# Altium PCB PCB_PFC_V01.PcbDoc
Units mil, origin at the board's own origin, x right, y up, seen from the top; angles counter-clockwise.
Board outline 3925 x 2500 mil, 2 copper layers (Top Layer, Bottom Layer); 43 components, 23 nets, 95 pads, 0 vias.
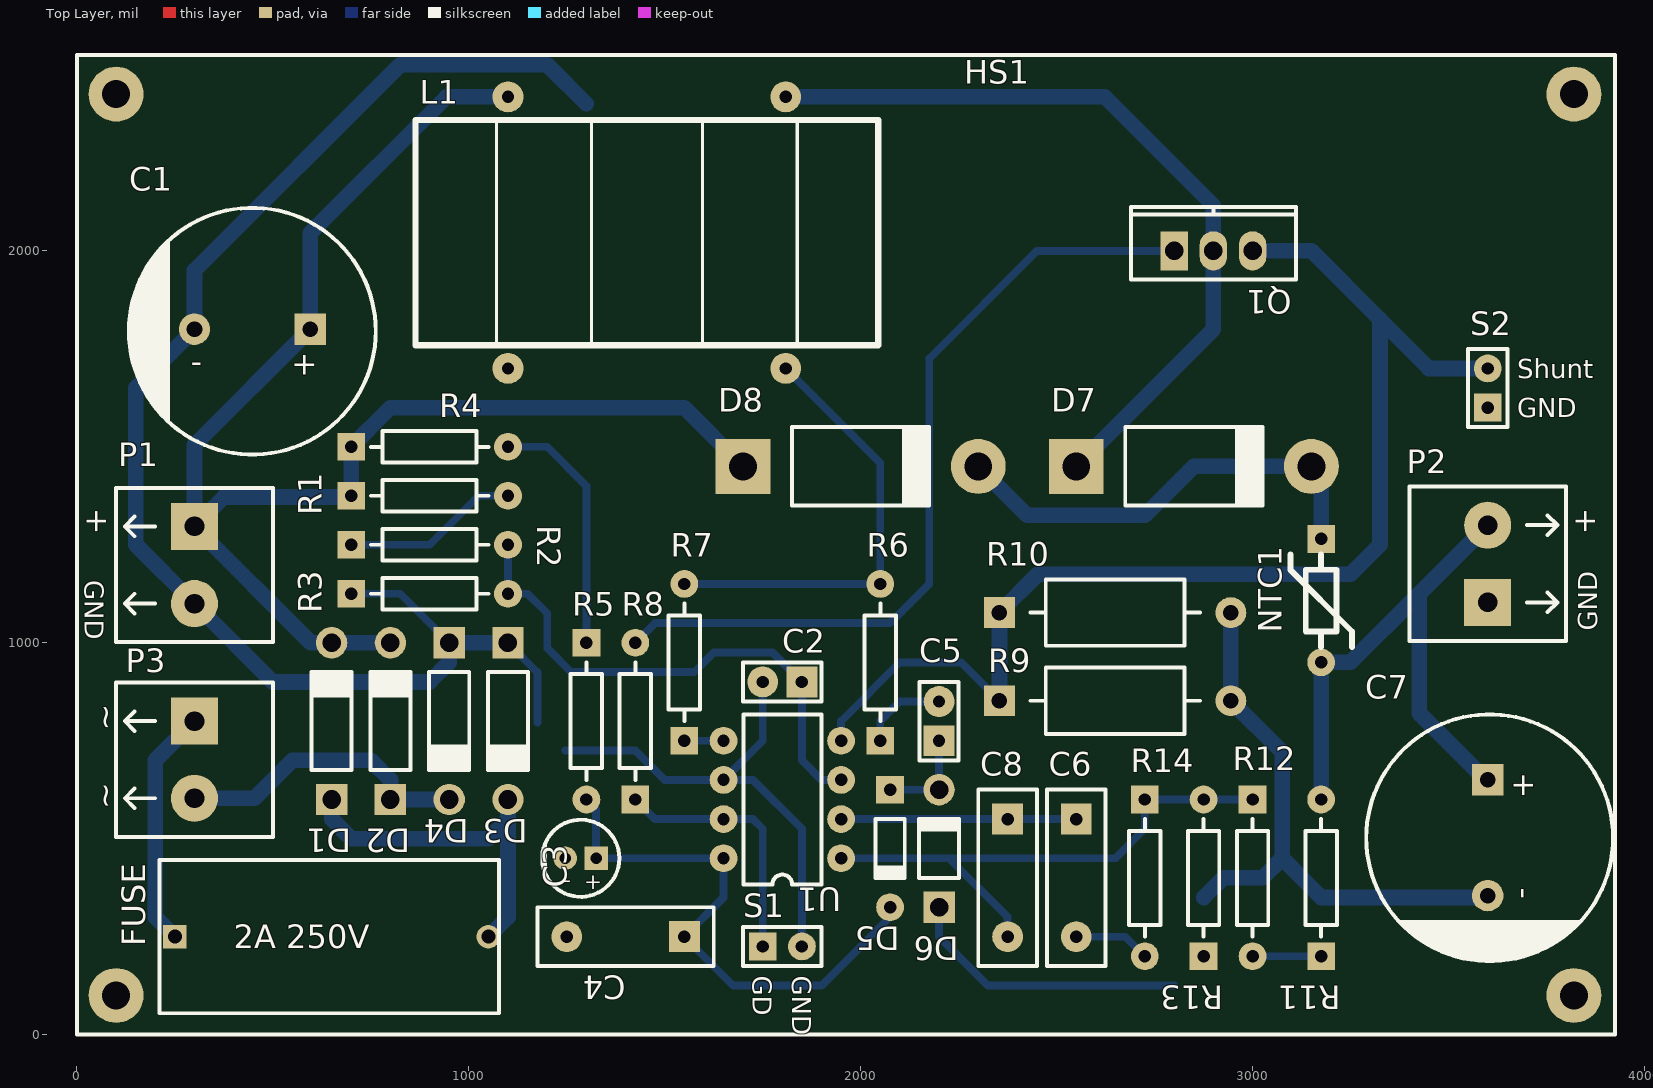
[diagram p0: Top Layer view]
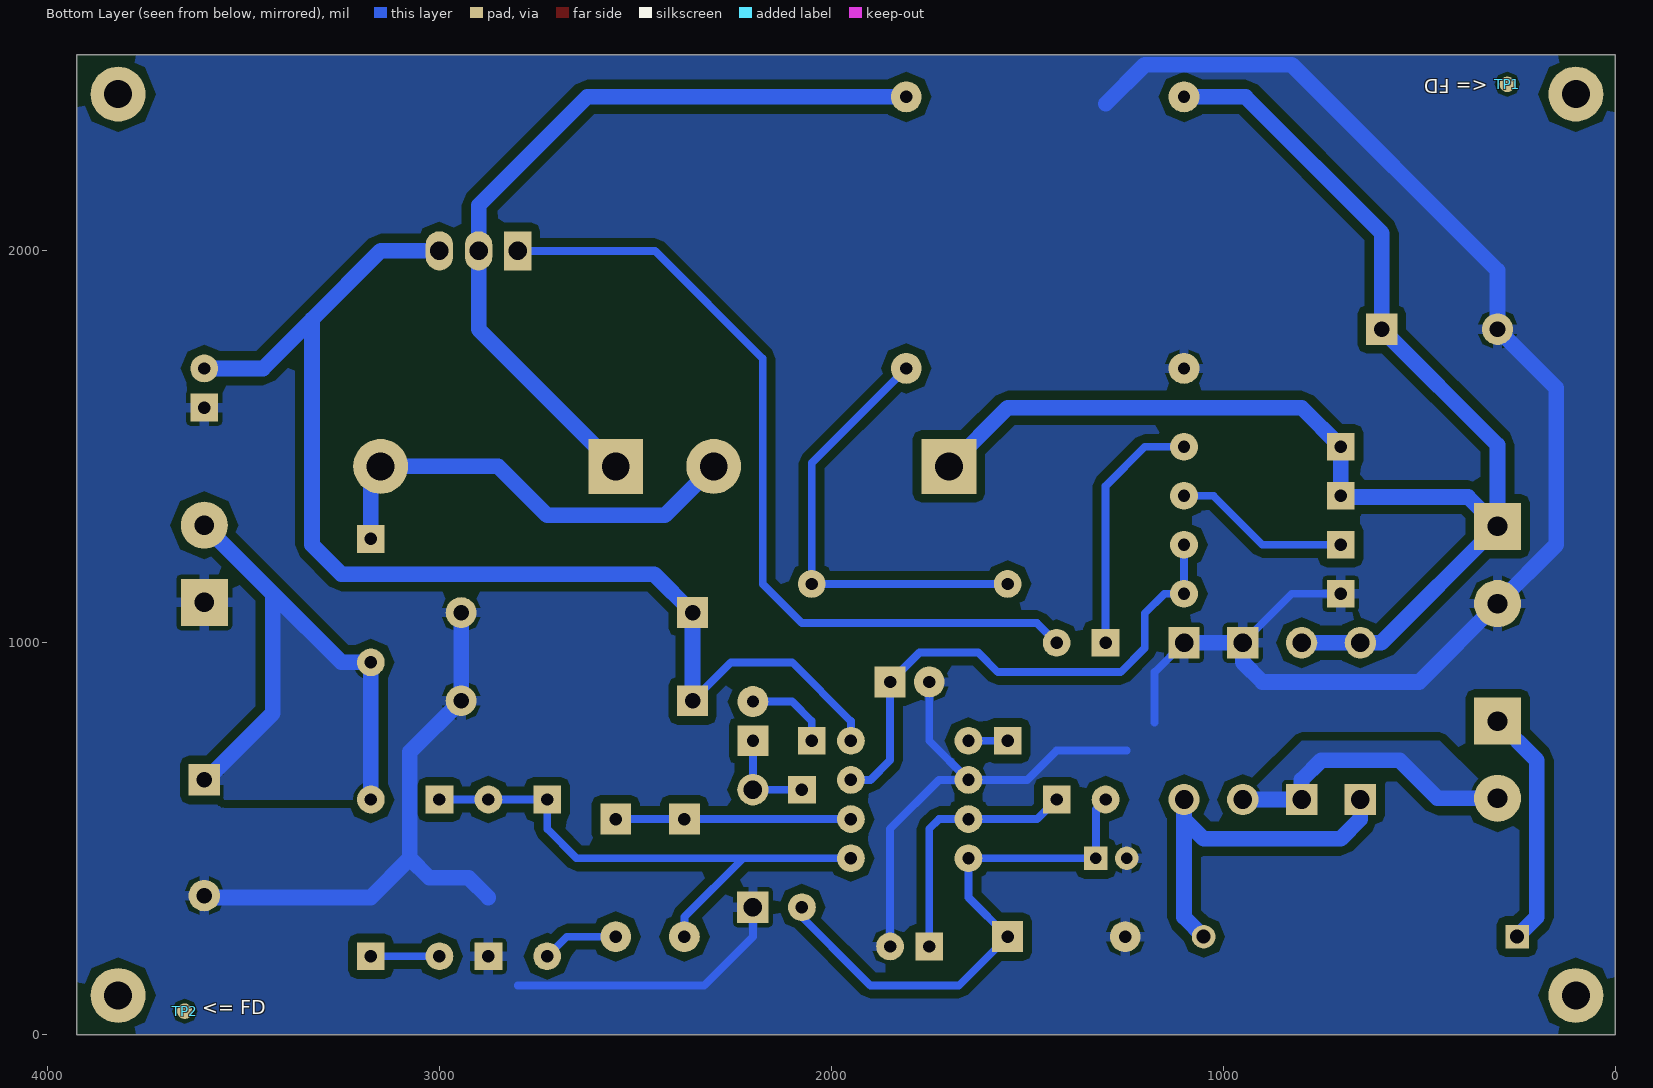
[diagram p1: Bottom Layer view, seen from below]
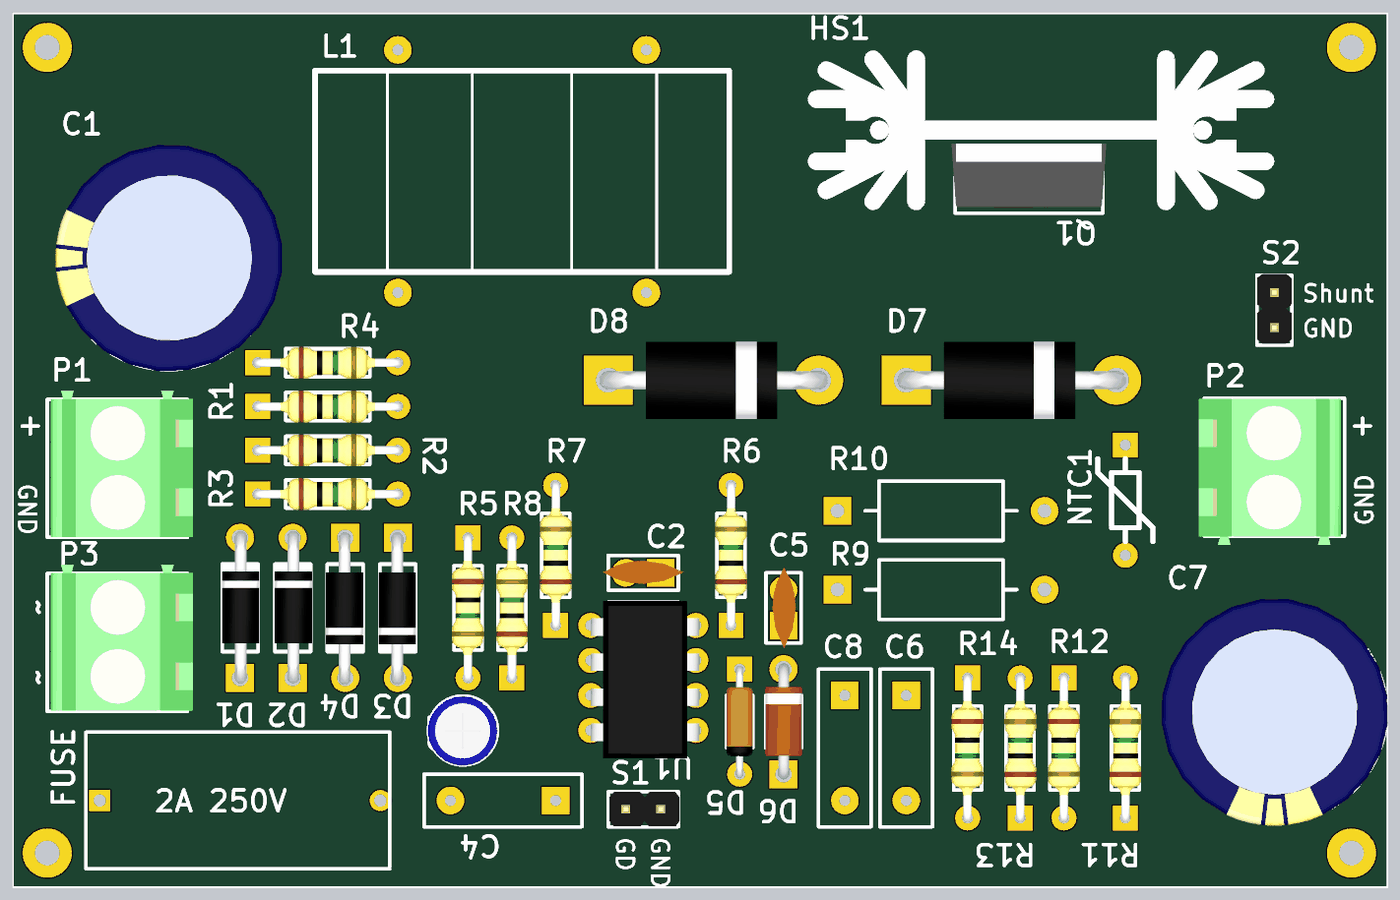
[diagram p2: 3D render of the assembled board from above, using the file's embedded part models]

## Layer stack, top to bottom
Top Solder: solder mask 0.4, Solder Resist, Dk 3.5
Top Layer: signal copper 1.4
Dielectric 1: dielectric 12.6, FR-4, Dk 4.8
Bottom Layer: signal copper 1.4
Bottom Solder: solder mask 0.4, Solder Resist, Dk 3.5

## Board outline
0,0 0,2500 3925,2500 3925,0

## Design rules (kind name [scope] priority, off if disabled: settings)
Clearance [All] p1: gap=10 ignorepadtopadclearanceinfootprint=FALSE except(0: Arc-Hole Track-Hole SMDPad-Hole THPad-Hole Via-Hole Fill-Hole Poly-Hole Region-Hole Text-Hole; 20: Arc-Arc Arc-Track Arc-THPad Arc-Fill Arc-Poly Arc-Region Track-Track Track-THPad Track-Fill Track-Poly Track-Region THPad-Fill THPad-Poly THPad-Region Fill-Fill Fill-Poly Fill-Region Poly-Poly Poly-Region Region-Region)
Height [All] p1: minheight=0 maxheight=3000 prefheight=500
PlaneConnect [All] p1: planeconnectstyle=Relief reliefexpansion=20 reliefentries=4 reliefconductorwidth=30 reliefairgap=10
PolygonConnect [All] p1: connectstyle=Relief reliefconductorwidth=25 reliefentries=4 polygonreliefangle="90 Angle" airgapwidth=10
RoutingVias [All] p1: holewidth=28 width=50 viastyle="Through Hole" minholewidth=28 minwidth=50 maxholewidth=28 maxwidth=50
SolderMaskExpansion [All] p1: expansion=4
Width [All] p1: maxlimit=40 minlimit=10 preferedwidth=20
28 further rules are at their usual default settings.

## Components (designator, comment, footprint, x,y, rotation, side; value= is the part's Value field where it differs from the comment)
C1 "1u" CP-16.0mm-25.0mm-7.5mm 595.28,1800 r0 top
C2 "Value" C100-200-100 1850,900 r180 top
C3 "22u" CP-5.0mm-11.0mm-2.0mm 1325,450 r0 top
C4 "100n" C300-450-150 1550,250 r180 top
C5 "12nF" C100-200-100 2200,750 r90 top
C6 "2.2u" C300-450-150 2550,550 r270 top
C7 "Value" CP-16.0mm-25.0mm-7.5mm 3600,650 r90 top
C8 "680n" C300-450-150 2375,550 r270 top
D1 "1N4007" DO-41-Plastic 650,600 r90 top
D2 "1N4007" DO-41-Plastic 800,600 r90 top
D3 "1N4007" DO-41-Plastic 1100,1000 r270 top
D4 "1N4007" DO-41-Plastic 950,1000 r270 top
D5 "1N4150" DO-35-Glass 2075,625 r270 top
D6 "1N4746A" DO-41-Glass 2200,325 r90 top
D7 "1N5401" DO-201-Plastic 2550,1450 r0 top
D8 "1N5401" DO-201-Plastic 1700,1450 r0 top
FUSE "Value" Fuse 250,250 r0 top
HS1 "HS-TO-220" HS-TO-220-183012 3600,2392 r180 top
L1 "Indutor" "NEE 30/15/14" 1454.33,2333.86 r180 top
NTC1 "Value" Thermistor-315mil 3175,1264.96 r270 top
P1 "DC_input" KRE_2 300,1296.85 r270 top
P2 "Terminal" KRE_2 3600,1103.15 r90 top
P3 "AC_input" KRE_2 300,800 r270 top
Q1 "IRF840" TO-220/123 2800,2000 r0 top
R1 "1.5M" R400-2.0mm 700,1375 r0 top
R2 "1.5M" R400-2.0mm 700,1250 r0 top
R3 "22k" R400-2.0mm 700,1125 r0 top
R4 "180k" R400-2.0mm 700,1500 r0 top
R5 "180k" R400-2.0mm 1300,1000 r270 top
R6 "100" R400-2.0mm 2050,750 r90 top
R7 "68k" R400-2.0mm 1550,750 r90 top
R8 "10" R400-2.0mm 1425,600 r90 top
R9 "0.33" R-AC01 2354,852 r0 top
R10 "0.33" R-AC01 2354,1077 r0 top
R11 "750k" R400-2.0mm 3175,200 r90 top
R12 "750k" R400-2.0mm 3000,600 r270 top
R13 "9.53k" R400-2.0mm 2875,200 r90 top
R14 "10k" R400-2.0mm 2725,600 r270 top
S1 "Header_1x2" HDR-M-1x2-2.54mm-180-9.2mm 1750,225 r0 top
S2 "Header_1x2" HDR-M-1x2-2.54mm-180-9.2mm 3600,1600 r90 top
TP1 "TestPoint" FD 275,2425 r0 top
TP2 "TestPoint" FD 3650,60 r0 top
U1 "IC" DIP08-300(100) 1950,450 r90 top

## Footprints (in the part's own frame and the unit in brackets; to place one, negate y for a bottom-side part, rotate by r counter-clockwise, add the part's x,y. Pads: shape width x height; smd on the part's side, far side on the other; paste and mask are expansions set on the pad)
C100-200-100 [mm] "Radial Cap, Thru-Hole; 2 Leads; 0.1 in Pin Spacing"
  rect 2x2 hole 0.8: 1(0,0)
  round 2 hole 0.8: 2(2.54,0)
  silkscreen extent -1.27,-1.27 3.81,1.27, body extent -1.65,-0.89 4.19,0.81, height 6.22
C300-450-150 [mm] "Radial Cap, Thru-Hole; 2 Leads; 0.3 in Pin Spacing"
  rect 2x2 hole 0.8: 1(0,0)
  round 2 hole 0.8: 2(7.62,0)
  silkscreen extent -1.91,-1.91 9.53,1.91
CP-5.0mm-11.0mm-2.0mm [mil] "Capacitor Electrolytic Radial - 5 x 11 mm - Pin Spacing 2.0 mm"
  rect 60x60 hole 30: 1(0,0)
  round 60 hole 30: 2(-78.74,0)
  silkscreen extent -138,-98 59,98, body extent -139,-101 59,98, height 454
CP-16.0mm-25.0mm-7.5mm [mil] "Capacitor Electrolytic Radial - 16 x 25 mm - Pin Spacing 7.5 mm"
  rect 80x80 hole 40: 1(0,0)
  round 80 hole 40: 2(-295.28,0)
  silkscreen extent -463,-320 167,310, body extent -472,-325 177,323, height 1028
DIP08-300(100) [mm] "DIP; 8 Leads; Row Spacing 7.62 mm; Pitch 2.54 mm"
  round 1.8 hole 0.8: 1(0,0) 2(2.54,0) 3(5.08,0) 4(7.62,0) 5(7.62,7.62) 6(5.08,7.62) 7(2.54,7.62) 8(0,7.62)
  silkscreen extent -1.69,1.27 9.31,6.32, body extent -2.03,-0.25 9.4,7.62, height 4.19
DO-35-Glass [mm] "Diode, Axial; Body 3.8 x 1.9 mm (LxDia. max), Lead Dia. 0.53 mm (max), Lead Spacing 7.62 mm; 3D Wagner Bernardo"
  rect 1.8x1.8 hole 0.8: A(0,0)
  round 1.8 hole 0.8: K(7.62,0)
  silkscreen extent 1.91,-0.95 5.71,0.95, body extent -0.26,-0.97 7.88,0.95, height 1.95
DO-41-Glass [mil] "Diode, Axial; Body 4.1 x 2.6 mm (LxDia. max), Lead Dia. 0.86 mm (max), Lead Spacing 7.62 mm; 3D Julien THIEREN"
  rect 80x80 hole 47.24: A(0,0)
  round 80 hole 47.24: K(300,0)
  silkscreen extent 75,-51 225,51, body extent -15,-53 316,52, height 111
DO-41-Plastic [mil] "Diode, Axial; Body 4.1 x 2.6 mm (LxDia. max), Lead Dia. 1.14 mm (max), Lead Spacing 10.16 mm; 3D Wagner Bernardo"
  rect 80x80 hole 47.24: A(0,0)
  round 80 hole 47.24: K(400,0)
  silkscreen extent 75,-52 325,51, body extent -15,-55 419,51, height 112
DO-201-Plastic [mil] "Diode, Axial; Body 9.5 x 5.3 mm (LxDia. max), Lead Dia. 1.30 mm (max), Lead Spacing 15.24 mm; 3D Wagner Bernardo"
  rect 140x140 hole 70.87: A(0,0)
  round 140 hole 70.87: K(600,0)
  silkscreen extent 125,-100 475,100, body extent -25,-110 627,110, height 239
FD [mm]
  round 1 smd far side: 10(0,0)
Fuse [mil] "Radial Cap, Thru-Hole; 2 Leads; 0.4 in Pin Spacing"
  rect 60x60 hole 35.43: 1(0,0)
  round 60 hole 35.43: 2(800,0)
  silkscreen extent -39,-195 827,195
HDR-M-1x2-2.54mm-180-9.2mm [mm] "Male Header, 1 line, 2 columns, 180 degrees, 9.2 mm length, 3D ASSMANN WSW components"
  rect 1.8x1.8 hole 0.8: 1(0,0)
  round 1.8 hole 0.8: 2(2.54,0)
  silkscreen extent -1.27,-1.27 3.81,1.27, body extent -1.17,-1.25 3.91,1.25, height 6.23
HS-TO-220-183012 [mil] "Heatsink TO220 183012"
  body extent 0,0 1331,457, height 984
KRE_2 [mil] "Terminal Block 2 pins"
  rect 120x120 hole 50: 1(0,0)
  round 120 hole 50: 2(196.85,0)
  silkscreen extent -98,-200 295,200, body extent -123,-190 294,216, height 559
"NEE 30/15/14" [mm] "ferrite core"
  round 2 hole 0.8: 1(-9,-1.5) 2(9,-1.5) 3(-9,16.1) 4(9,16.1)
  silkscreen extent -15,0 15,14.6
R400-2.0mm [mm] "Axial Device, Thru-Hole; 2 Leads; 0.4 in Pin Spacing"
  rect 1.8x1.8 hole 0.8: 1(0,0)
  round 1.8 hole 0.8: 2(10.16,0)
  silkscreen extent 1.27,-1.02 8.89,1.02, body extent -0.3,-1.17 10.46,1.14, height 2.93
R-AC01 [mm] "Cemented Wirewound Resistor 1 W"
  rect 2x2 hole 1: 1(0,0)
  round 2 hole 1: 2(15,0)
  silkscreen extent 2,-2.15 13,2.15
Thermistor-315mil [mm] "Thermistor 315 mil"
  rect 1.8x1.8 hole 0.8: 1(0,0)
  round 1.8 hole 0.8: 2(8,0)
  silkscreen extent 1,-2 7,2
TO-220/123 [mil] "TO, Thru-Hole, Vertical, Heatsink Mounted; 3 In-Line Leads; Pitch 2.54 mm"
  rect 70x100 hole 47.24: 1(0,0)
  oval 70x100 hole 47.24: 2(100,0) 3(200,0)
  silkscreen extent -111,-73 311,112, body extent -121,-59 321,126, height 832

## Part data
C1: library part Capacitor-Electrolytic, "Electrolytic Capacitor", Voltage="400 V"
C2 C4: library part Capacitor, "Capacitor", Voltage="100 V", LatestRevisionDate=17-Jul-2002, LatestRevisionNote="Re-released for DXP Platform.", PackageReference=RAD-0.3, Published=8-Jun-2000, Publisher="Altium Limited"
C3: library part Capacitor-Electrolytic, "Electrolytic Capacitor", Voltage="25 V"
C5 C6 C8: library part Capacitor, "Capacitor", Voltage="25 V", LatestRevisionDate=17-Jul-2002, LatestRevisionNote="Re-released for DXP Platform.", PackageReference=RAD-0.3, Published=8-Jun-2000, Publisher="Altium Limited"
C7: library part Capacitor-Electrolytic, "Electrolytic Capacitor", Voltage="450 V"
D1 D2 D3 D4: "General Purpose Rectifier", Forward Current (If)="1 A", Forward Voltage (Vf)="1.1 V", Non-Repetitive Peak Forward Surge Current (Ifsm)="30 A", Peak Repetitive Reverse Voltage (Vrrm)="1000 V", Reverse Current (Ir)="5 uA", Total Capacitance (Ct)="15 pF"
D5: library part 1N914A, "Small Signal Diode", Forward Current (If)="300 mA", Forward Voltage (Vf)="1 V", Non-Repetitive Peak Forward Surge Current (Ifsm)="1 A", Peak Repetitive Reverse Voltage (Vrrm)="100 V", Reverse Current (Ir)="25 nA", Total Capacitance (Ct)="4 pF", Max Recovery Time (trr)=4ns
D6: "Zener Diode", Forward Voltage (Vf)="1.2 V", Power Dissipation (Pd)="1.3 W", Zener Current (Iz)="50 mA", Zener Voltage (Vz)="18 V"
D7 D8: "3 Amp Rectifier", Forward Current (If)="3 A", Forward Voltage (Vf)="1 V", Non-Repetitive Peak Forward Surge Current (Ifsm)="200 A", Peak Repetitive Reverse Voltage (Vrrm)="100 V", Reverse Current (Ir)="10 uA", Total Capacitance (Ct)="50 pF"
FUSE: library part FUSE, "Negative Temperature Coefficient Thermistor"
HS1: "Heatsink TO-220"
L1: "Indutor Acoplado - Filtro EMI"
NTC1: library part NTC, "Negative Temperature Coefficient Thermistor"
P1 P2 P3: library part KRE_2, "Terminal Block 1x2"
Q1: library part IRFZ46N, "HEXFET Power MOSFET", Drain Current (Id)="53 A", Drain Current Peak (Idp)="180 A", Gate-to-Source Voltage (Vgs)="20 V", Power Dissipation (Pd)="107 W", Static Drain-to-Source On-Resistance (Rdson)="16.5 mR", Fall Time (Tf)="57 ns", Rise Time (Rt)="76 ns", Turn-Off Delay (Tdoff)="52 ns", Turn-On Delay (tdon)="14 ns"
R1 R2 R3 R4 R5 R6 R7 R8 R11 R12 R13 R14: library part Resistor, "Resistor", Power="1/4 W", Tolerance=5%, LatestRevisionDate=17-Jul-2002, LatestRevisionNote="Re-released for DXP Platform.", PackageReference=AXIAL-0.3, Published=8-Jun-2000, Publisher="Altium Limited"
R9 R10: library part ResistorPower, "Power Resistor", Power="1 W", Tolerance=5%, LatestRevisionDate=17-Jul-2002, LatestRevisionNote="Re-released for DXP Platform.", PackageReference=AXIAL-0.3, Published=8-Jun-2000, Publisher="Altium Limited"
S1 S2: "Header, 1 Line, 2 Columns, 2 Pins", LatestRevisionDate=17-Jul-2002, LatestRevisionNote="Re-released for DXP Platform.", Publisher="Altium Limited"
TP1 TP2: "Test Point"
U1: library part L6562, "PFC Controller"

## Free pads (board coordinates)
  round 140 hole 70.87: 11(3820,2400) 12(3820,100) 13(100,100) 14(100,2400)

## Nets (pads, with @x,y where several pads share a name; then routed paths per layer and width w, separated by ;. In a path a pad name is that pad's centre, name@x,y a point inside that pad or via, vN(x,y) a via of type N, cw(c..) or ccw(c..) an arc to the next point about the centre after c; other vN are vias at no path point)
GND: C1.2 C2.2 C3.2 C4.2 C7.2 D3.A D4.A D6.A L1.4 P1.2 P2.1 R3.1 R9.2 R10.2 R13.1 S1.2 S2.1 U1.6 | length 7222.4
  Bottom Layer w20: R3.1 825,1125 D4.A D4.A@971.26,1000 ; D3.A 1175,925 1175,796.26 ; C4.2@1246.26,253.74 C4.2 ; 1246.26,725 1425,725 1500,650 U1.6 ; C2.2 1750,750 U1.6 ; S1.2 1850,525 1725,650 U1.6 ; D6.A 2200,250 2325,125 2800,125
  Bottom Layer w40: D4.A 950,950 900,900 500,900 P1.2 150,1250 150,1650 C1.2 300,1950 825,2475 1200,2475 1300,2375 ; D4.A@971.26,1000 D3.A ; 2875,350 2925,400 3025.43,400 3075.43,450 ; R10.2 R9.2 3075.43,721.12 3075.43,450 ; C7.2@3600,350 3175.43,350 3075.43,450
NetC2_1: C2.1 R2.2 R3.2 U1.3 | length 1382.1
  Bottom Layer w20: R2.2 R3.2 1150,1125 1200,1075 1200,986.71 1261.71,925 1575,925 1625,975 1775,975 C2.1 1850,700 1900,650 U1.3
NetC3_1: C3.1 C4.1 D5.K R5.2 U1.8 | length 1411.4
  Bottom Layer w20: R5.2 1325,575 C3.1 U1.8 1650,350 C4.1 1675,125 1900,125 D5.K@2100,325
NetC5_1: C5.1 D5.A D6.K | length 250
  Bottom Layer w20: D5.A D6.K C5.1
NetC5_2: C5.2 R6.1 | length 220.7
  Bottom Layer w20: R6.1 2050,800 2100,850 C5.2
NetC6_1: C6.1 C8.1 U1.2 | length 600
  Bottom Layer w20: U1.2 C8.1 C6.1
NetC6_2: C6.2 R14.2 | length 195.7
  Bottom Layer w20: C6.2 2675,250 R14.2
NetC7_1: C7.1 NTC1.2 P2.2 R11.2 | length 1472.2
  Bottom Layer w40: R11.2 NTC1.2 3250,950 3425,1125 ; C7.1@3600,645.28 3425,820.28 3425,1125 ; P2.2 3425,1125
NetC8_2: C8.2 R12.1 R13.2 R14.1 U1.1 | length 1418.2
  Bottom Layer w20: U1.1 2225,450 ; C8.2 2375,300 2225,450 ; R12.1 R13.2 R14.1 2725,525 2650,450 2225,450
NetD1_A: D1.A D3.K FUSE.2 | length 912.1
  Bottom Layer w40: D1.A 650,550 700,500 1050,500 1100,550 ; FUSE.2 1100,300 1100,550 ; D3.K 1100,550
NetD2_A: D2.A D4.K P3.2 | length 760.8
  Bottom Layer w40: P3.2 453.15,603.15 550,700 750,700 800,650 D2.A D4.K
NetD7_A: D7.A L1.1 Q1.2 | length 2017
  Bottom Layer w40: L1.1 2623.09,2392.91 2900,2116 Q1.2 2900,1800 D7.A
NetD7_K: D7.K D8.K NTC1.1 | length 1148.9
  Bottom Layer w40: D8.K 2425,1325 2725,1325 2850,1450 D7.K 3175,1425 NTC1.1
NetFUSE_1: FUSE.1 P3.1 | length 612.1
  Bottom Layer w40: FUSE.1 200,300 200,700 P3.1
NetL1_3: L1.3 R6.2 R7.2 | length 1150
  Bottom Layer w20: R7.2 R6.2 2050,1458.66 L1.3
NetQ1_G: Q1.1 R8.2 | length 2126
  Bottom Layer w20: R8.2 1475,1050 2075,1050 2175,1150 2175,1725 2450,2000 Q1.1
NetQ1_S: Q1.3 R9.1 R10.1 S2.2 U1.4 | length 3123.6
  Bottom Layer w20: U1.4 1950,800 2100,950 2256,950 R9.1 ; R10.1@2354,1073 R10.1
  Bottom Layer w40: R9.1 R10.1@2354,1073 ; R10.1 2452,1175 3250,1175 3325,1250 3325,1825 ; Q1.3 3150,2000 3325,1825 ; S2.2 3450,1700 3325,1825
NetR1_2: R1.2 R2.1 | length 451.8
  Bottom Layer w20: R2.1 900,1250 1025,1375 R1.2
NetR4_2: R4.2 R5.1 | length 641.4
  Bottom Layer w20: R4.2 1200,1500 1300,1400 R5.1
NetR7_1: R7.1 U1.5 | length 100
  Bottom Layer w20: R7.1 U1.5
NetR8_1: R8.1 S1.1 U1.7 | length 656.1
  Bottom Layer w20: R8.1 1475,550 U1.7 1725,550 1750,525 S1.1
NetR11_1: R11.1 R12.2 | length 200
  Bottom Layer w20: R12.2 R11.1 R11.1@3200,200
VCC: C1.1 D1.K D2.K D8.A L1.2 P1.1 R1.1 R4.1 | length 3803.3
  Bottom Layer w40: D2.K D1.K 596.85,1000 P1.1 ; L1.2 942.91,2392.91 595.28,2045.28 C1.1 300,1504.72 P1.1 ; D8.A 1550,1600 800,1600 R4.1 R1.1 696.85,1371.85 375,1371.85 P1.1
pads on no net: TP1.10 TP2.10

## Polygon pours and split planes (outlines as drawn)
NetD2_A on Bottom Layer "Bottom Layer-No Net" (solid, pour order 0): 950,600 800,750 550,750 550,700 750,700 800,650 800,600
NetD2_A on Bottom Layer "Bottom Layer-No Net" (solid, pour order 2): 300,603.15 446.85,750 550,750 550,700 453.15,603.15
NetC7_1 on Bottom Layer "GND" (solid, pour order 8): 3175,600 3554.72,600 3600,645.28 3425,820.28 3425,1125 3250,950 3175,950
GND on Bottom Layer "Bottom Layer-No Net" (solid, remove dead copper, pour order 10): 3925,0 3925,2500 0,2500 0,0

## Silkscreen, mask and mechanical layers (free items; w line width, h text height)
Top Overlay:
  the board outline again, w10
  text "Shunt" at 3675,1675 h48
  text "GND" at 3675,1575 h48
  text "+" at 75,1275 h60 r90
  text "+" at 3875,1275 h60 r90
  text "GND" at 20,1160 h48 r270
  text "GND" at 3880,1030 h48 r90
  text "~" at 100,775 h60 r90
  text "~" at 100,575 h60 r90
  text "2A 250V" at 400,220 h60
  text "GD" at 1725,150 h48 r270
  text "GND" at 1825,150 h48 r270

## Text inside footprints (layer, text, board x,y; h text height)
C1: Top Overlay "+" at 614.96,1734 h59.06 r180; Top Overlay "-" at 319.68,1734 h59.06 r180
C3: Top Overlay "-" at 1261.26,405 h40 r180; Top Overlay "+" at 1340,405 h40 r180
C7: Top Overlay "+" at 3666,669.68 h59.06 r270; Top Overlay "-" at 3666,374.41 h59.06 r270
TP1: Bottom Overlay "<= FD" at 325,2450 h60 r180
TP2: Bottom Overlay "<= FD" at 3605,40 h60